# EAGLE board wemos-boost-rev-1 (EAGLE 7.3.0)
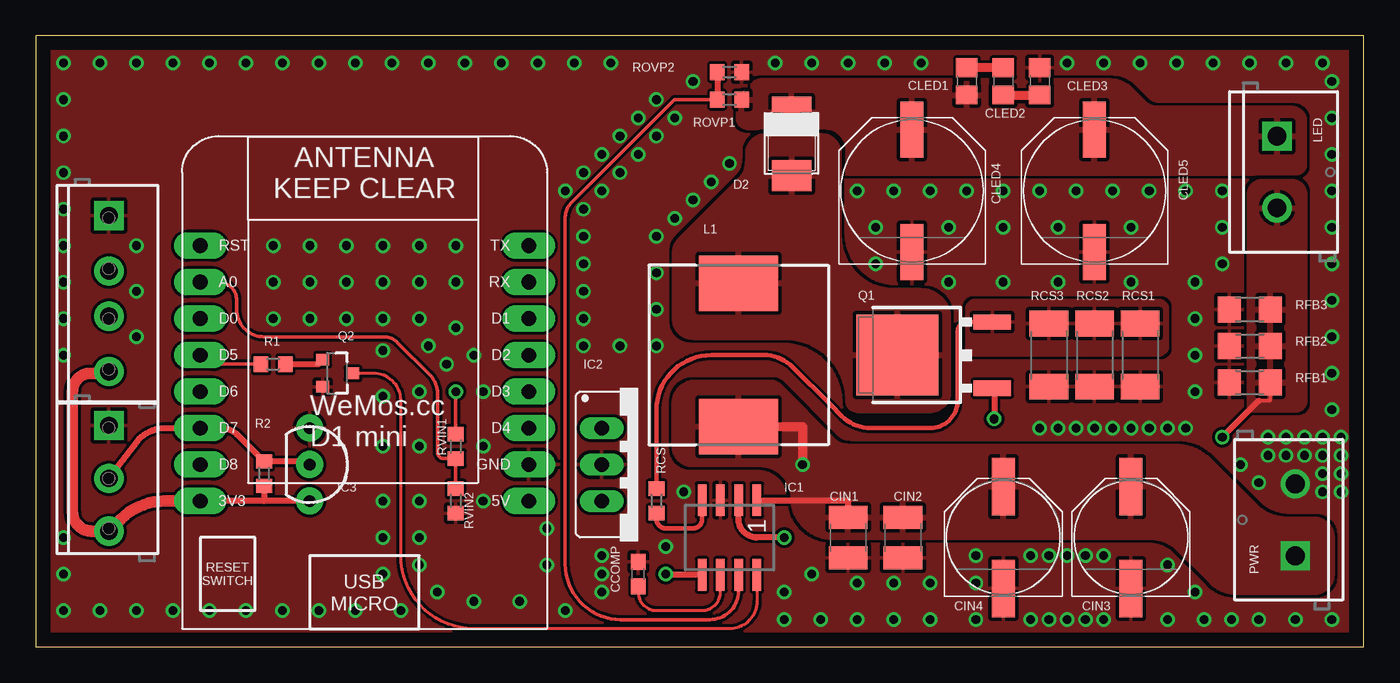
[diagram p0: board, top side]
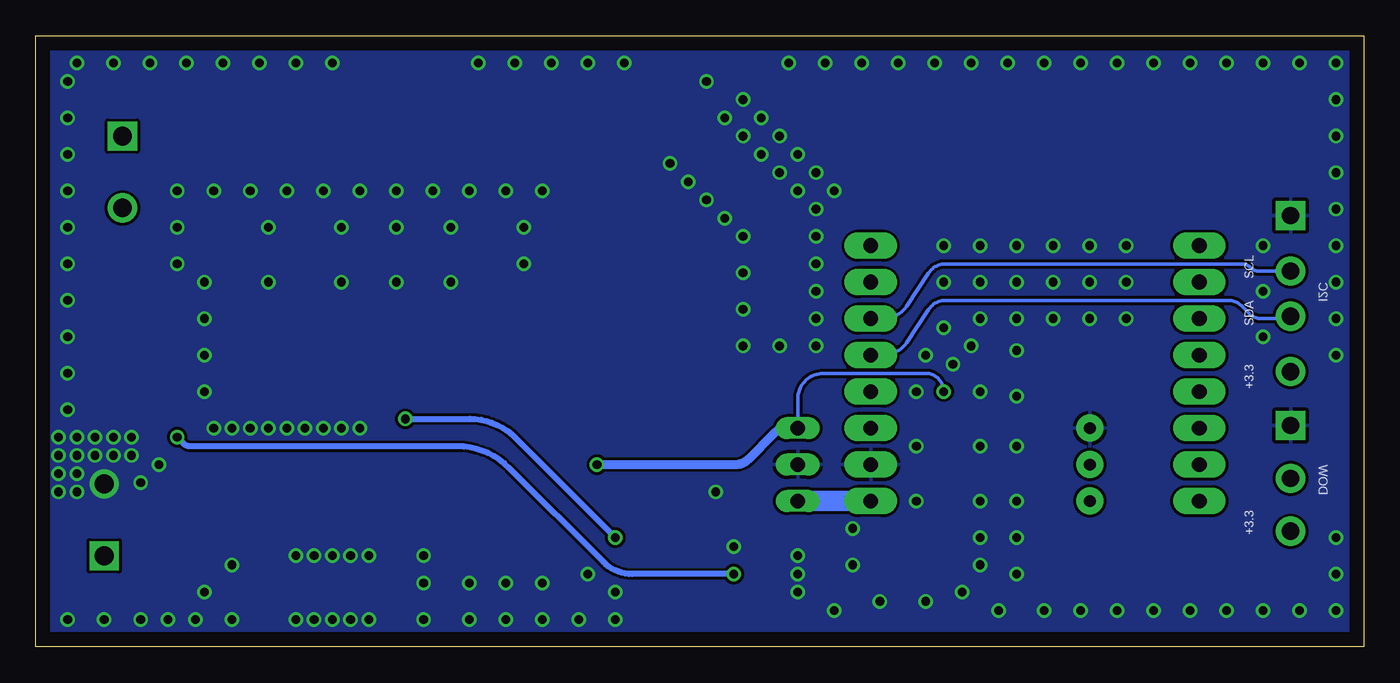
[diagram p1: board, bottom side, seen from below]

Size 92.38 x 42.53 mm. Coordinates in mm from the lower left corner, seen from the top.
Outline: 0,0 92.38,0 92.38,42.53 0,42.53 0,0
Copper layers (1*16): Top 0.035mm / dielectric 1.5mm / Bottom 0.035mm
Design rules "default": minimum track width 10mil, minimum drill 24mil, track to track 8mil, track to pad 8mil, pad to pad 8mil, via to via 8mil, smd to smd 8mil, copper to edge 40mil, drill to drill 8mil, minimum pad ring 10mil, minimum via ring 8mil, stop-mask expansion 4mil, vias tented up to drill 0mil, thermal gap 10mil

## Footprints (pad centres in the part's own frame; a part is rotated, then mirrored left to right if it is on the bottom)
C0603 = smd 1.1 x 1: 1 -0.85,0; 2 0.85,0
C1210 = smd 1.6 x 2.7: 1 -1.4,0; 2 1.4,0
PANASONIC_F = smd 4 x 1.6: + 3.55,0; - -3.55,0
C0805 = smd 1.3 x 1.5: 1 -0.95,0; 2 0.95,0
PANASONIC_G = smd 3.9 x 1.6: + 4.25,0; - -4.25,0
SMB = smd 2.159 x 2.743: A 2.108,-0.102; K -2.311,-0.127
SCREWTERMINAL-3.5MM-3_LOCK.007S = drill 1.2 pad 2.032 square: 1 -0.178,0 | drill 1.2 pad 2.032: 2 3.5,0; 3 7.178,0
SCREWTERMINAL-3.5MM-4_LOCK = drill 1.2 pad 2.032 square: 1 -0.178,0 | drill 1.2 pad 2.032: 2 3.678,0; 3 6.822,0; 4 10.678,0
SOP08 = smd 0.6 x 2.2: 1 -1.905,-2.6; 2 -0.635,-2.6; 3 0.635,-2.6; 4 1.905,-2.6; 5 1.905,2.6; 6 0.635,2.6; 7 -0.635,2.6; 8 -1.905,2.6
78XXS = drill 1.016 long: GND 0,-2.54; IN -2.54,-2.54; OUT 2.54,-2.54
TO-92-AMMO = drill 0.813 pad 1.88: 1 -2.54,0; 2 0,0; 3 2.54,0
DR12X = smd 3.85 x 5.5: P$1 -5,0; P$2 4.975,0
SCREWTERMINAL-5MM-2 = drill 1.3 pad 2.032 square: 1 0,0 | drill 1.3 pad 2.032: 2 5,0
TO-252/DPAK = smd 1.06 x 2.6: 1 -2.3,-4.31; 3 2.3,-4.31 | smd 5.632 x 5.7: 2 0,2.288
SOT23-3 = smd 0.8 x 0.9: 1 -0.95,-1; 2 0.95,-1; 3 0,1.1
R0603 = smd 1 x 1.1: 1 -0.85,0; 2 0.85,0
R2010 = smd 1.8 x 2.7: 1 -2.2,0; 2 2.2,0
R1206 = smd 1.6 x 1.803: 1 -1.422,0; 2 1.422,0
WEMOS-D1-MINI = drill 1.016 pad 1.829 long: 3V3 -10.16,-10.16; 5V 12.7,-10.16; A0 -10.16,5.08; D0 -10.16,2.54; D1 12.7,2.54; D2 12.7,0; D3 12.7,-2.54; D4 12.7,-5.08; D5 -10.16,0; D6 -10.16,-2.54; D7 -10.16,-5.08; D8 -10.16,-7.62; GND 12.7,-7.62; RESET -10.16,7.62; RX 12.7,5.08; TX 12.7,7.62

## Placement (x,y rotation side)
CCOMP  [C0603]  41.91,5.08 90 top
CIN1  3.3u 50v  [C1210]  56.52,7.62 270 top
CIN2  3.3u 50v  [C1210]  60.33,7.62 270 top
CIN3  100u 50v  [PANASONIC_F]  76.2,7.62 90 top
CIN4  100u 50v  [PANASONIC_F]  67.31,7.62 90 top
CLED1  3.3uF 35v  [C0805]  64.77,39.37 90 top
CLED2  3.3uF 35v  [C0805]  67.31,39.37 270 top
CLED3  3.3uF 35v  [C0805]  69.85,39.37 90 top
CLED4  33u 160v  [PANASONIC_G]  60.96,31.75 90 top
CLED5  33u 160v  [PANASONIC_G]  73.66,31.75 90 top
D2  100v 10a  [SMB]  52.7,34.92 270 top
DOW  [SCREWTERMINAL-3.5MM-3_LOCK.007S]  5.08,15.24 270 top
I2C  [SCREWTERMINAL-3.5MM-4_LOCK]  5.08,29.84 270 top
IC1  [SOP08]  48.26,7.62 180 top
IC2  D24V5F5  [78XXS]  41.91,12.7 270 top
IC3  DS18B20  [TO-92-AMMO]  19.05,12.7 270 top
L1  DR12X  [DR12X]  48.9,20.32 270 top
LED  [SCREWTERMINAL-5MM-2]  86.36,35.56 270 top
PWR  [SCREWTERMINAL-5MM-2]  87.63,6.35 90 top
Q1  100v 10a  [TO-252/DPAK]  62.23,20.32 90 top
Q2  NPN  [SOT23-3]  20.95,19.05 270 top
R1  100R  [R0603]  16.51,19.68 0 top
R2  2K2  [R0603]  15.88,12.06 90 top
RCS  100R  [R0603]  43.18,10.16 90 top
RCS1  0R1  [R2010]  76.83,20.32 270 top
RCS2  0R1  [R2010]  73.66,20.32 270 top
RCS3  0R1  [R2010]  70.48,20.32 270 top
RFB1  0R68  [R1206]  84.45,18.41 180 top
RFB2  0R68  [R1206]  84.45,20.95 180 top
RFB3  0R68  [R1206]  84.45,23.5 180 top
ROVP1  100K  [R0603]  48.26,38.1 0 top
ROVP2  2K2  [R0603]  48.26,40.01 180 top
RVIN1  100K  [R0603]  29.21,13.97 90 top
RVIN2  10K0  [R0603]  29.21,10.16 270 top
WEMOS  [WEMOS-D1-MINI]  21.59,20.32 0 top

## Library data of the parts
CCOMP CIN1-CIN4 CLED1-CLED5 R1 R2 RCS RCS1-RCS3 RFB1-RFB3 ROVP1 ROVP2 RVIN1 RVIN2 = rcl
D2 = diode-special-packages
DOW = SparkFun-Connectors; PROD_ID: CONN-08288
I2C = SparkFun-Connectors
IC1 = vreg-special
IC2 = v-reg
IC3 = SparkFun-Sensors; STORE_ID: SEN-00245
L1 = inductor-power
LED PWR = SparkFun-Connectors; SF_SKU: PRT-08432
Q1 = SparkFun-DiscreteSemi; PROD_ID: TRANS-09984
Q2 = SparkFun-DiscreteSemi; PROD_ID: TRANS-08049
WEMOS = esp8266modules

## Nets
+3V3: DOW.3 I2C.4 IC3.3 R2.1 WEMOS.3V3
+5V: IC2.OUT WEMOS.5V
COMP: CCOMP.1 IC1.6
CS: IC1.4 RCS.1
CS`: Q1.3 RCS1.1 RCS2.1 RCS3.1 RCS.2
DOW: DOW.2 IC3.2 R2.2 WEMOS.D7
FB: IC1.5 LED.2 RFB1.1 RFB2.1 RFB3.1
GATE: IC1.2 Q1.1
GND: CCOMP.2 CIN1.2 CIN2.2 CIN3.- CIN4.- CLED3.2 CLED4.- CLED5.- DOW.1 I2C.1 IC1.3 IC2.GND IC3.1 PWR.2 Q2.2 RCS1.2 RCS2.2 RCS3.2 RFB1.2 RFB2.2 RFB3.2 ROVP2.1 RVIN2.2 WEMOS.GND
LEDPWR: CLED1.1 CLED4.+ CLED5.+ D2.K LED.1 ROVP1.2
N$1: R1.1 WEMOS.D5
N$2: CLED1.2 CLED2.1
N$3: CLED2.2 CLED3.1
OVP: IC1.7 ROVP1.1 ROVP2.2
PWM: IC1.8 Q2.3
PWMCTL: Q2.1 R1.2
SCL: I2C.2 WEMOS.D1
SDA: I2C.3 WEMOS.D2
SWITCHNODE: D2.A L1.P$1 Q1.2
VCC: CIN1.1 CIN2.1 CIN3.+ CIN4.+ IC1.1 IC2.IN L1.P$2 PWR.1 RVIN1.2
VIN: RVIN1.1 RVIN2.1 WEMOS.A0

## Tracks (layer width: path | path; a pad name or v marks a point on that pad's centre or on a via)
+3V3
  Top 0.254: I2C.4 5.08,19.05
  Top 0.406: IC3.3 15.88,10.16 | 15.88,10.16 WEMOS.3V3 | R2.1 15.88,10.16
  Top 0.813: WEMOS.3V3 8.94,10.16 arc45 5.93,8.91 DOW.3 3.88,8.06 arc-90 2.54,9.41 2.54,17.78 arc-90 3.81,19.05 5.08,19.05
+5V
  Bottom 1.422: WEMOS.5V IC2.OUT
COMP
  Top 0.203: CCOMP.1 41.91,3.81 arc90 43.18,2.54 46.35,2.54 arc90 47.62,3.81 IC1.6
CS
  Top 0.203: RCS.1 43.18,8.89
  Top 0.305: 43.18,8.89 arc90 43.81,8.26 45.72,8.26 arc90 46.35,8.89 IC1.4
CS`
  Top 0.305: RCS.2 43.18,16.51 arc-90 46.99,20.32 50.67,20.32 arc-45 52.64,19.5 55.24,16.9 56.09,16.06 arc45 58.06,15.24 62.23,15.24 arc90 64.14,17.14 64.14,21.94 arc-90 64.81,22.62 Q1.3
  pour Top (isolate 0.254, rank 4): 78.74,23.5 78.74,20.95 arc-90 78.11,20.32 65.41,20.32 arc-90 64.77,20.95 64.77,23.5 arc-90 65.41,24.13 78.11,24.13 arc-90
DOW
  Top 0.406: DOW.2 7.18,14.49 arc-45 8.99,15.24 WEMOS.D7 12.92,15.24 arc-45 14,14.79 R2.2 18.84,12.91 IC3.2
FB  (via drill 0.6)
  Top 0.254: 43.81,5.02 v43.81,5.08 | 85.09,17.14 85.88,17.14 RFB1.1
  Top 0.406: IC1.5 43.81,5.02 | v82.55,14.61 85.09,17.14
  Bottom 0.406: v43.81,5.08 50.89,5.08 arc45 52.9,5.91 59.47,12.48 arc-45 63.06,13.97 81.65,13.97 arc45 82.1,14.16 v82.55,14.61
  pour Top (isolate 0.254, rank 3): 84.45,16.51 84.45,31.49 arc-90 85.35,32.38 87.37,32.38 arc-90 88.27,31.49 88.27,17.15 arc-90 87.63,16.51
GATE  (via drill 0.6)
  Top 0.254: Q1.1 66.67,18.02
  Top 0.406: 66.67,18.02 v66.67,15.88 | v52.07,7.62 50.16,7.62 arc-90 48.9,8.89 IC1.2
  Bottom 0.406: v66.67,15.88 62.19,15.88 arc45 59.01,14.56 v52.07,7.62
GND  (via drill 0.6)
  other vias: 77.47,15.24 76.2,15.24 74.93,15.24 73.66,15.24 72.39,15.24 71.12,15.24 69.85,15.24 85.72,13.34 90.81,12.06 90.81,10.79 89.53,10.79 89.53,12.06 90.81,13.34 87,13.34 88.27,13.34 89.53,13.34 90.81,13.34 78.74,1.91 74.3,1.91 73.03,1.91 71.75,1.91 70.48,1.91 69.22,1.91 69.22,6.35 70.48,6.35 71.75,6.35 73.03,6.35 74.3,6.35 52.07,1.91 52.07,3.81 45.09,10.79 43.81,6.99 39.37,6.35 39.37,5.08 39.37,3.81 16.51,25.4 26.67,25.4 29.21,25.4 29.21,22.23 6.99,24.77 6.99,21.59 24.13,20.64 27.3,20.95 26.67,17.78 26.67,13.97 26.67,10.16 26.67,7.62 24.13,17.46 24.13,13.97 24.13,10.16 24.13,7.62 30.48,3.17 27.94,3.81 26.67,5.71 24.13,5.08 25.4,2.54 26.67,27.94 21.59,27.94 19.05,27.94 16.51,27.94 19.05,25.4 21.59,25.4 24.13,27.94 24.13,25.4 16.51,22.86 19.05,22.86 21.59,22.86 24.13,22.86 26.67,22.86 29.21,27.94 41.91,36.83 33.66,3.17 36.83,2.54 40.64,35.56 39.37,34.29 38.1,33.02 36.83,31.75 44.45,36.83 43.18,35.56 41.91,34.29 40.64,33.02 39.37,31.75 43.18,38.1 45.72,39.37 71.75,40.64 74.3,40.64 76.83,40.64 79.38,40.64 81.92,40.64 90.17,39.37 90.17,36.83 90.17,34.29 90.17,31.75 90.17,29.21 90.17,26.67 90.17,24.13 90.17,21.59 90.17,19.05 90.17,16.51 1.91,40.64 4.45,40.64 6.99,40.64 9.53,40.64 12.06,40.64 14.61,40.64 17.14,40.64 19.68,40.64 22.23,40.64 24.77,40.64 27.3,40.64 29.84,40.64 32.38,40.64 1.91,38.1 1.91,35.56 1.91,33.02 1.91,30.48 1.91,27.94 1.91,25.4 1.91,22.86 1.91,20.32 1.91,2.54 1.91,5.08 1.91,7.62 4.45,2.54 6.99,2.54 9.53,2.54 12.06,2.54 14.61,2.54 17.14,2.54 19.68,2.54 22.23,2.54 34.92,40.64 37.47,40.64 40.01,40.64 56.52,40.64 53.98,40.64 51.44,40.64 59.05,40.64 61.59,40.64 84.45,40.64 87,40.64 89.53,40.64 54.61,1.91 57.15,1.91 59.69,1.91 62.23,1.91 62.23,4.45 65.41,1.91 81.28,1.91 90.17,1.91 87.63,1.91 85.09,1.91 83.19,1.91 57.15,31.75 59.69,31.75 62.23,31.75 64.77,31.75 67.31,31.75 69.85,31.75 72.39,31.75 74.93,31.75 77.47,31.75 80.01,31.75 82.55,31.75 82.55,29.21 82.55,26.67 76.2,25.4 76.2,29.21 71.12,25.4 71.12,29.21 63.5,25.4 63.5,29.21 58.42,29.21 58.42,26.67 67.31,29.21 67.31,25.4 78.74,15.24 80.01,15.24 80.64,17.78 80.64,20.32 80.64,22.86 80.64,25.4 48.26,33.66 46.99,32.38 45.72,31.11 44.45,29.84 43.18,28.57 43.18,26.04 43.18,23.5 43.18,20.95 57.15,4.45 59.69,4.45 65.41,6.35 80.64,3.81 78.74,5.71 83.82,12.7 85.09,11.43 85.72,14.61 87,14.61 88.27,14.61 89.53,14.61 90.81,14.61 53.98,5.08 65.41,4.45 38.1,30.48 38.1,28.57 38.1,26.67 38.1,24.77 38.1,22.86 38.1,20.95 35.56,5.71 35.56,8.26 40.64,20.95 28.57,19.68 30.48,20.32 31.11,17.78 31.11,13.97 31.11,10.16 6.99,27.94
  pour Top (isolate 0.203, rank 6): 0,42.55 92.71,42.55 92.71,0 0,0
  pour Bottom (isolate 0.203, rank 5): 92.71,42.55 0,42.55 0,0 92.71,0
  pour Top (isolate 0.254, rank 2, no thermals): 89.53,9.53 87.73,9.53 arc-90 85.72,11.53 85.72,13.34 89.53,13.34
  pour Bottom (isolate 0.254, rank 2, no thermals): 85.72,13.34 89.53,13.34 89.53,9.53 85.72,9.53
LEDPWR
  pour Top (isolate 0.254, rank 4): 55.88,33.02 87.63,33.02 arc90 88.27,33.66 88.27,36.57 arc90 87.37,37.47 78.06,37.47 arc-45 77.05,37.88 76.12,38.81 arc45 74.78,39.37 50.43,39.37 arc45 49.98,39.18 48.9,38.1 48.9,36.83 arc90 49.53,36.2 53.98,36.2 arc-90 55.88,34.29
N$1
  Top 0.254: WEMOS.D5 12.06,19.68 R1.1
N$2
  Top 0.61: CLED2.1 CLED1.2
N$3
  Top 0.61: CLED2.2 CLED3.1
OVP
  Top 0.254: IC1.7 48.9,3.91 arc-90 46.89,1.91 40.69,1.91 arc-90 36.83,5.77 36.83,29.95 arc-45 37.2,30.85 44.45,38.1 ROVP1.1
  Top 0.406: ROVP2.2 ROVP1.1
PWM
  Top 0.203: IC1.8 50.16,3.17 arc-90 48.26,1.27 30.48,1.27 arc-90 25.4,6.35 25.4,17.14 arc90 23.5,19.05 Q2.3
PWMCTL
  Top 0.406: R1.2 19.64,19.68 Q2.1
SCL
  Bottom 0.254: I2C.2 7.3,26.17 arc45 7.84,26.39 7.9,26.45 arc-45 8.44,26.67 29.09,26.67 arc-56 30.27,26.04 31.82,23.71 arc56 33.41,22.86 WEMOS.D1
SDA
  Bottom 0.254: WEMOS.D2 33.41,20.32 arc-56 31.82,21.17 30.27,23.5 arc56 29.09,24.13 9.42,24.13 arc45 8.52,23.76 7.99,23.23 arc-45 7.09,22.86 5.08,22.86 I2C.3
SWITCHNODE
  pour Top (isolate 0.254, rank 3): 61.59,24.77 59.74,24.77 arc-90 55.88,28.63 55.88,34.29 arc90 54.61,35.56 50.8,35.56 arc90 49.53,34.29 49.53,33.76 arc-45 49,32.49 44.82,28.31 arc45 44.45,27.41 44.45,22.86 arc90 45.72,21.59 52.07,21.59 arc-90 56.52,17.14 arc90 57.15,16.51 62.23,16.51 arc90 63.5,17.78 63.5,22.86 arc90
VCC  (via drill 0.6)
  Top 0.254: v29.21,17.78 RVIN1.2
  Top 0.406: IC1.1 56.52,10.22 CIN1.1
  Top 0.61: L1.P$2 53.34,15.35 v53.34,12.7
  Bottom 0.254: IC2.IN 39.37,17.25 arc90 37.57,19.05 30.48,19.05 arc90 v29.21,17.78
  Bottom 0.61: v53.34,12.7 43.71,12.7 arc-45 42.81,13.07 41.01,14.87 arc45 40.11,15.24 IC2.IN
  pour Top (isolate 0.254, rank 2): 45.87,18.41 51.06,18.41 arc-45 51.7,18.15 55.51,14.34 arc45 56.41,13.97 79.23,13.97 arc-45 81.65,12.97 84.8,9.82 arc45 87.04,8.89 88.9,8.89 arc-90 90.17,7.62 90.17,5.08 arc-90 88.9,3.81 83.6,3.81 arc-45 81.81,4.55 79.48,6.88 arc45 77.69,7.62 55.5,7.62 arc-90 52.7,10.41 arc90 50.42,12.7 45.72,12.7 arc-90 44.45,13.97 44.45,17 arc-90
  pour Top (isolate 0.254, rank 2, no thermals): 85.72,8.26 89.53,8.26 89.53,4.45 85.72,4.45
VIN
  Top 0.254: RVIN2.1 RVIN1.1 28.36,13.12 arc-90 27.94,13.54 27.94,17.63 arc45 27.38,18.97 25.18,21.17 arc45 24.18,21.59 15.88,21.59 arc-90 13.97,23.5 13.97,24.13 arc90 12.7,25.4 WEMOS.A0

## Text on the board
bNames: SCL | SDA | +3.3 | +3.3